# EAGLE board Robot_Psoc (EAGLE 7.6.0)
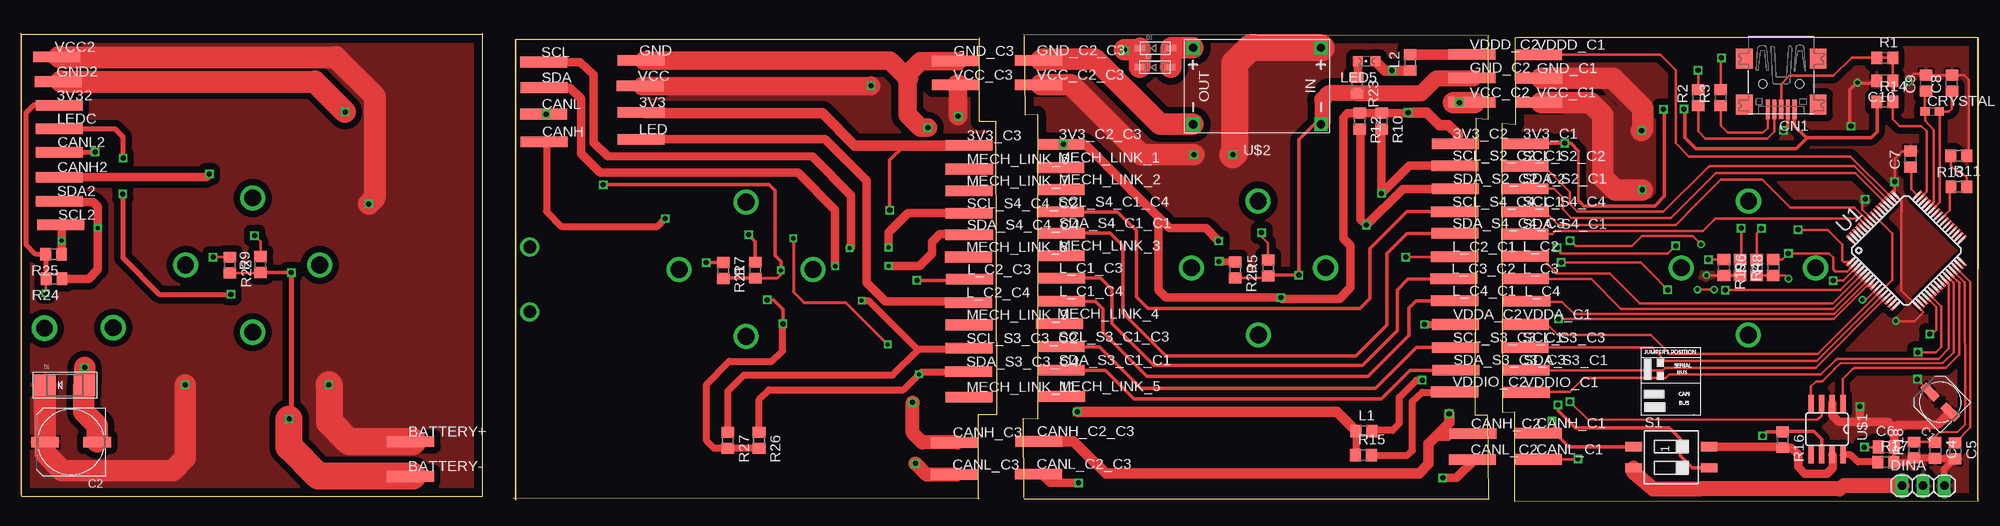
[diagram p0: board, top side]
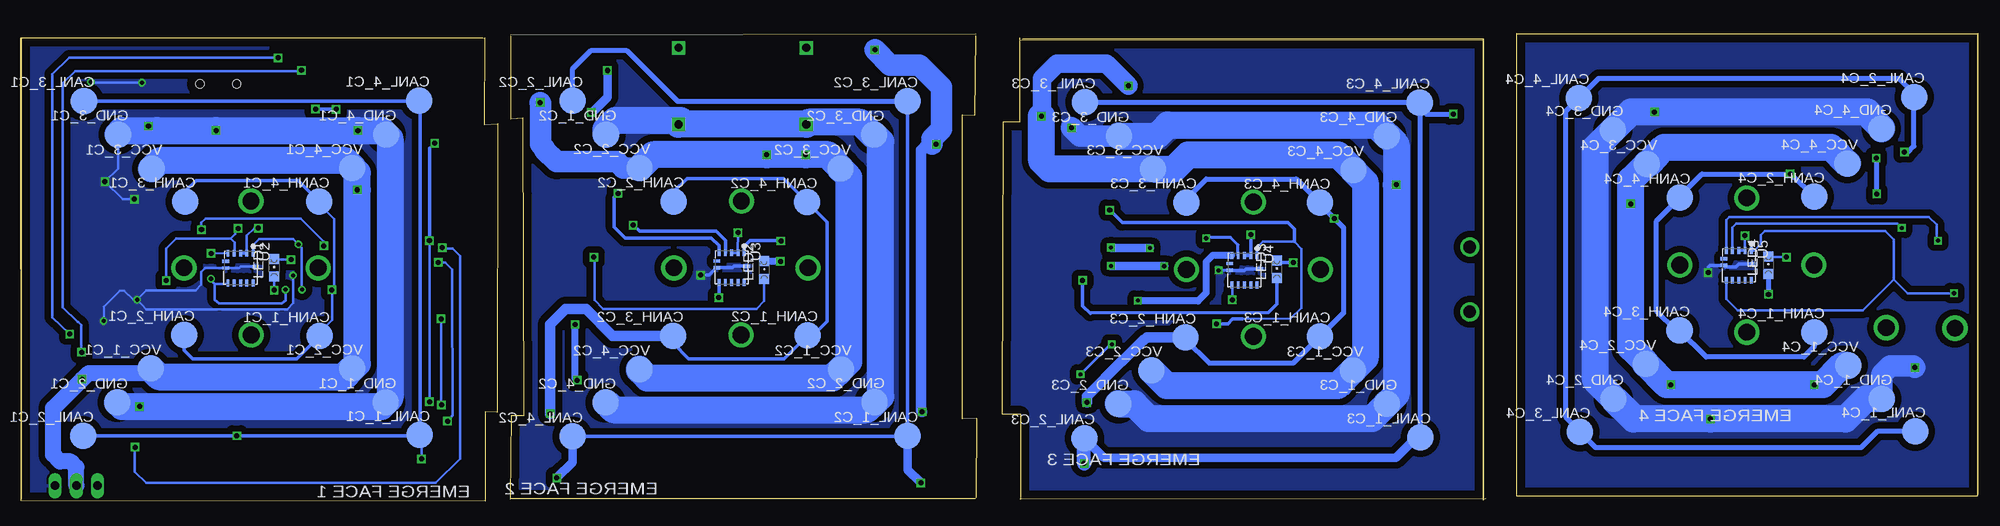
[diagram p1: board, bottom side, seen from below]

Size 233.42 x 55.85 mm. Coordinates in mm from the lower left corner, seen from the top.
Outline: 119.5,55.75 175,55.59
Outline: 114.3,55.35 114.26,45.31 116.23,45.31 116.33,10.37 114.16,10.35 114.14,0.25
Outline: 175.04,0.23 174.93,10.22 173.43,10.25 173.53,45.74 174.93,45.64 174.93,55.5
Outline: 119.59,55.55 119.69,46.11 121.17,46.16 121.17,9.83 119.43,9.91 119.53,0.44
Outline: 0.02,55.62 0.02,0.62 55.02,0.62 55.02,55.62
Outline: 114.3,0.31 58.72,0.36
Outline: 233.34,0.3 233.34,55.3
Outline: 119.56,0.31 175.1,0.32
Outline: 113.97,55.15 58.97,55.15 58.97,0.15
Outline: 0,0.76 0,55.76 55,55.76 55,0.76
Outline: 55,0.85 55,55.85
Outline: 0,0.85 0,55.85
Outline: 114.34,55 59,55.12 59,0.12
Outline: 178.37,55.33 233.37,55.33 233.37,0.33
Outline: 178.18,44.97 176.58,45.07 176.63,10.62 178.08,10.67 178.08,0 233.37,0.04 233.42,55.29 178.11,55.35 178.18,44.97
Copper layers (1*16): Top 0.035mm / dielectric 1.5mm / Bottom 0.035mm
Design rules "default": minimum track width 10mil, minimum drill 24mil, track to track 8mil, track to pad 8mil, pad to pad 8mil, via to via 8mil, smd to smd 8mil, copper to edge 40mil, drill to drill 8mil, minimum pad ring 10mil, minimum via ring 8mil, stop-mask expansion 4mil, vias tented up to drill 0mil, thermal gap 10mil

## Footprints (pad centres in the part's own frame; a part is rotated, then mirrored left to right if it is on the bottom)
TP11R = smd 0.635 x 1.27: P$1 0.381,0; P$2 1.016,0; P$3 -0.254,0; P$4 -0.889,0; P$5 -1.524,0; P$6 1.613,0; P$7 2.21,0; P$8 -2.146,0; P$9 -2.769,0 | smd 1.1 x 1.1: TP 0,0
UD-5X5,8_NICHICON = smd 2.3 x 1: + 1.725,0; - -1.7,0
UD-8X10_NICHICON = smd 3.3 x 1.3: + 3.125,0; - -3.125,0
C0805 = smd 1.3 x 1.5: 1 -0.95,0; 2 0.95,0
B2,54 = smd 3.175 x 3.175 bottom: P$1 0,0 | smd 2.54 x 2.54 bottom: TP 0,0
USB-MINIB = smd 0.5 x 2.308: D+ 0,4.064; D- -0.8,4.064; GND 1.6,4.064; ID 0.8,4.064; VBUS -1.6,4.064 | smd 2 x 2.4: GND1 -4.4,-2; GND2 -4.4,3.5; GND3 4.4,3.5; GND4 4.4,-2 | hole 1: -2.2,1; 2.2,1
C0603 = smd 1.1 x 1: 1 -0.85,0; 2 0.85,0
SMADIODE = smd 2.54 x 2.54: A 2.349,0; C -2.349,0
SOD-123 = smd 1.2 x 0.7: A 1.85,0; C -1.85,0
1X03 = drill 1.016 long: 1 -2.54,0; 2 0,0; 3 2.54,0
R0805 = smd 1.3 x 1.5: 1 -0.95,0; 2 0.95,0
CHIPLED_0805 = smd 1.2 x 1.2: A 0,-1.05; C 0,1.05
SMS-002 = smd 1.092 x 2.007: 1 -1.27,-4.496; 2 1.27,-4.496; 3 1.27,4.496; 4 -1.27,4.496
TQFP64-10X10 = smd 1.2 x 0.3: 1 -5.7,3.75; 2 -5.7,3.25; 3 -5.7,2.75; 4 -5.7,2.25; 5 -5.7,1.75; 6 -5.7,1.25; 7 -5.7,0.75; 8 -5.7,0.25; 9 -5.7,-0.25; 10 -5.7,-0.75; 11 -5.7,-1.25; 12 -5.7,-1.75; 13 -5.7,-2.25; 14 -5.7,-2.75; 15 -5.7,-3.25; 16 -5.7,-3.75; 33 5.7,-3.75; 34 5.7,-3.25; 35 5.7,-2.75; 36 5.7,-2.25; 37 5.7,-1.75; 38 5.7,-1.25; 39 5.7,-0.75; 40 5.7,-0.25; 41 5.7,0.25; 42 5.7,0.75; 43 5.7,1.25; 44 5.7,1.75; 45 5.7,2.25; 46 5.7,2.75; 47 5.7,3.25; 48 5.7,3.75 | smd 0.3 x 1.2: 17 -3.75,-5.7; 18 -3.25,-5.7; 19 -2.75,-5.7; 20 -2.25,-5.7; 21 -1.75,-5.7; 22 -1.25,-5.7; 23 -0.75,-5.7; 24 -0.25,-5.7; 25 0.25,-5.7; 26 0.75,-5.7; 27 1.25,-5.7; 28 1.75,-5.7; 29 2.25,-5.7; 30 2.75,-5.7; 31 3.25,-5.7; 32 3.75,-5.7; 49 3.75,5.7; 50 3.25,5.7; 51 2.75,5.7; 52 2.25,5.7; 53 1.75,5.7; 54 1.25,5.7; 55 0.75,5.7; 56 0.25,5.7; 57 -0.25,5.7; 58 -0.75,5.7; 59 -1.25,5.7; 60 -1.75,5.7; 61 -2.25,5.7; 62 -2.75,5.7; 63 -3.25,5.7; 64 -3.75,5.7
XDCR_VCNL4010-GS08 = smd 0.805 x 0.35: 1 -1.772,1.5; 2 -1.772,0.75; 3 -1.772,0; 4 -1.772,-0.75; 5 -1.772,-1.5; 7 1.772,-1.5; 8 1.772,-0.75; 9 1.772,0; 10 1.772,0.75; 11 1.772,1.5 | smd 0.4 x 0.805: 6 -0.8,-1.772; 12 -0.175,1.772; 13 0,-1.772
SO8 = smd 0.66 x 2.032: 1 -1.905,-3.073; 2 -0.635,-3.073; 3 0.635,-3.073; 4 1.905,-3.073; 5 1.905,3.073; 6 0.635,3.073; 7 -0.635,3.073; 8 -1.905,3.073
DC-DC-STEP-DOWN-MP2307 = drill 1 pad 1.6 square: IN+ -7.62,-4.572; IN- -7.62,4.572; OUT+ 7.62,-4.572; OUT- 7.62,4.572

## Placement (x,y rotation side)
3V3  PTR1TP11R  [TP11R]  74.2,46.43 0 top
3V3_C1  PTR1TP11R  [TP11R]  179.65,42.67 0 top
3V3_C2  PTR1TP11R  [TP11R]  171.3,42.67 0 top
3V3_C2_C3  PTR1TP11R  [TP11R]  124.28,42.61 0 top
3V3_C3  PTR1TP11R  [TP11R]  113.3,42.46 0 top
3V32  PTR1TP11R  [TP11R]  4.77,47.24 0 top
BATTERY+  PTR1TP11R  [TP11R]  46.7,7.11 0 top
BATTERY-  PTR1TP11R  [TP11R]  46.68,2.98 0 top
C1  [UD-5X5,8_NICHICON]  228.85,11.83 135 top
C2  [UD-8X10_NICHICON]  5.92,7.06 180 top
C4  2200pF  [C0805]  228.24,6.09 270 top
C5  10nF  [C0805]  230.63,6.04 270 top
C6  1u  [C0805]  222.4,6.5 0 top
C7  1u  [C0805]  225.32,40.84 90 top
C8  36pF  [C0805]  230.25,49.9 90 top
C9  18pF  [C0805]  227.18,49.9 90 top
C10  0.1u  [C0805]  222.22,50.18 180 top
CANH  PTR1TP11R  [TP11R]  62.61,42.9 0 top
CANH2  PTR1TP11R  [TP11R]  4.79,38.68 0 top
CANH_1_C1  TPB2,54  [B2,54]  197.82,19.71 0 top
CANH_1_C2  TPB2,54  [B2,54]  139.61,19.82 0 top
CANH_1_C3  TPB2,54  [B2,54]  78.49,19.67 0 top
CANH_1_C4  TPB2,54  [B2,54]  19.54,20.17 0 top
CANH_2_C1  TPB2,54  [B2,54]  213.93,19.86 0 top
CANH_2_C2  TPB2,54  [B2,54]  155.56,35.79 0 top
CANH_2_C3  TPB2,54  [B2,54]  94.51,19.54 0 top
CANH_2_C4  TPB2,54  [B2,54]  19.53,36.35 0 top
CANH_3_C1  TPB2,54  [B2,54]  213.82,35.77 0 top
CANH_3_C2  TPB2,54  [B2,54]  155.64,19.75 0 top
CANH_3_C3  TPB2,54  [B2,54]  94.43,35.68 0 top
CANH_3_C4  TPB2,54  [B2,54]  35.6,20.38 0 top
CANH_4_C1  TPB2,54  [B2,54]  197.86,35.76 0 top
CANH_4_C2  TPB2,54  [B2,54]  139.68,35.71 0 top
CANH_4_C3  TPB2,54  [B2,54]  78.49,35.63 0 top
CANH_4_C4  TPB2,54  [B2,54]  35.55,36.23 0 top
CANH_C1  PTR1TP11R  [TP11R]  181.2,8.12 0 top
CANH_C2  PTR1TP11R  [TP11R]  173.4,8.07 0 top
CANH_C2_C3  PTR1TP11R  [TP11R]  121.64,7.16 0 top
CANH_C3  PTR1TP11R  [TP11R]  111.59,7.02 0 top
CANL  PTR1TP11R  [TP11R]  62.58,46.21 0 top
CANL2  PTR1TP11R  [TP11R]  4.8,41.66 0 top
CANL_1_C1  TPB2,54  [B2,54]  185.87,7.9 0 top
CANL_1_C2  TPB2,54  [B2,54]  127.66,7.8 0 top
CANL_1_C3  TPB2,54  [B2,54]  66.5,7.62 0 top
CANL_1_C4  TPB2,54  [B2,54]  7.48,8.34 0 top
CANL_2_C1  TPB2,54  [B2,54]  225.99,7.81 0 top
CANL_2_C2  TPB2,54  [B2,54]  167.63,47.79 0 top
CANL_2_C3  TPB2,54  [B2,54]  106.56,7.52 0 top
CANL_2_C4  TPB2,54  [B2,54]  7.6,48.25 0 top
CANL_3_C1  TPB2,54  [B2,54]  225.91,47.78 0 top
CANL_3_C2  TPB2,54  [B2,54]  127.69,47.75 0 top
CANL_3_C3  TPB2,54  [B2,54]  106.5,47.62 0 top
CANL_3_C4  TPB2,54  [B2,54]  47.48,8.28 0 top
CANL_4_C1  TPB2,54  [B2,54]  185.92,47.83 0 top
CANL_4_C2  TPB2,54  [B2,54]  167.65,7.73 0 top
CANL_4_C3  TPB2,54  [B2,54]  66.6,47.59 0 top
CANL_4_C4  TPB2,54  [B2,54]  47.6,48.13 0 top
CANL_C1  PTR1TP11R  [TP11R]  181.2,5 0 top
CANL_C2  PTR1TP11R  [TP11R]  173.35,4.97 0 top
CANL_C2_C3  PTR1TP11R  [TP11R]  121.59,3.24 0 top
CANL_C3  PTR1TP11R  [TP11R]  111.55,3.17 0 top
CN1  [USB-MINIB]  209.88,50.82 180 top
CRYSTAL  32.768kHz  [C0603]  227.89,46.53 0 top
D1  [SMADIODE]  5.17,13.87 0 top
D2  [SOD-123]  135.2,51.79 0 top
D3  [SOD-123]  135.23,54.07 0 top
DINA  [1X03]  226.82,1.85 0 top
GND  PTR1TP11R  [TP11R]  74.2,52.6 0 top
GND2  PTR1TP11R  [TP11R]  4.69,50.08 0 top
GND_1_C1  TPB2,54  [B2,54]  189.9,11.82 0 top
GND_1_C2  TPB2,54  [B2,54]  163.64,43.78 0 top
GND_1_C3  TPB2,54  [B2,54]  70.52,11.63 0 top
GND_1_C4  TPB2,54  [B2,54]  11.48,12.23 0 top
GND_2_C1  TPB2,54  [B2,54]  221.92,11.79 0 top
GND_2_C2  TPB2,54  [B2,54]  131.64,11.83 0 top
GND_2_C3  TPB2,54  [B2,54]  102.54,11.63 0 top
GND_2_C4  TPB2,54  [B2,54]  43.49,12.23 0 top
GND_3_C1  TPB2,54  [B2,54]  221.85,43.79 0 top
GND_3_C2  TPB2,54  [B2,54]  131.68,43.75 0 top
GND_3_C3  TPB2,54  [B2,54]  102.47,43.59 0 top
GND_3_C4  TPB2,54  [B2,54]  43.54,44.32 0 top
GND_4_C1  TPB2,54  [B2,54]  189.89,43.78 0 top
GND_4_C2  TPB2,54  [B2,54]  163.69,11.79 0 top
GND_4_C3  TPB2,54  [B2,54]  70.52,43.6 0 top
GND_4_C4  TPB2,54  [B2,54]  11.52,44.45 0 top
GND_C1  PTR1TP11R  [TP11R]  181.25,50.49 0 top
GND_C2  PTR1TP11R  [TP11R]  173.25,50.54 0 top
GND_C2_C3  PTR1TP11R  [TP11R]  121.61,52.62 0 top
GND_C3  PTR1TP11R  [TP11R]  111.69,52.54 0 top
L1  330-600Ohm@1Mhz  [R0805]  160.12,8.38 0 top
L2  330-600Ohm@1Mhz  [R0805]  165.63,52.37 90 top
L_C1_C3  PTR1TP11R  [TP11R]  124.31,26.64 0 top
L_C1_C4  PTR1TP11R  [TP11R]  124.33,23.87 0 top
L_C2  PTR1TP11R  [TP11R]  179.62,29.23 0 top
L_C2_C1  PTR1TP11R  [TP11R]  171.22,29.18 0 top
L_C2_C3  PTR1TP11R  [TP11R]  113.38,26.48 0 top
L_C2_C4  PTR1TP11R  [TP11R]  113.25,23.71 0 top
L_C3  PTR1TP11R  [TP11R]  179.65,26.56 0 top
L_C3_C2  PTR1TP11R  [TP11R]  171.12,26.56 0 top
L_C4  PTR1TP11R  [TP11R]  179.83,23.87 0 top
L_C4_C1  PTR1TP11R  [TP11R]  171.22,23.92 0 top
LED  PTR1TP11R  [TP11R]  74.2,43.2 0 top
LED1  [CHIPLED_0805]  203.22,27.86 0 bottom
LED2  [CHIPLED_0805]  144.78,27.6 0 bottom
LED3  [CHIPLED_0805]  83.63,27.67 0 bottom
LED4  [CHIPLED_0805]  25.01,28.18 0 bottom
LED5  [CHIPLED_0805]  160.45,52.52 90 top
LEDC  PTR1TP11R  [TP11R]  4.81,44.46 0 top
MECH_LINK_1  PTR1TP11R  [TP11R]  124.2,39.82 0 top
MECH_LINK_2  PTR1TP11R  [TP11R]  124.28,37.2 0 top
MECH_LINK_3  PTR1TP11R  [TP11R]  124.25,29.31 0 top
MECH_LINK_4  PTR1TP11R  [TP11R]  124.1,21.18 0 top
MECH_LINK_5  PTR1TP11R  [TP11R]  124.31,12.52 0 top
MECH_LINK_6  PTR1TP11R  [TP11R]  113.33,39.64 0 top
MECH_LINK_7  PTR1TP11R  [TP11R]  113.3,37.05 0 top
MECH_LINK_8  PTR1TP11R  [TP11R]  113.25,29.15 0 top
MECH_LINK_9  PTR1TP11R  [TP11R]  113.27,21.05 0 top
MECH_LINK_11  PTR1TP11R  [TP11R]  113.27,12.43 0 top
R1  0  [R0805]  222.22,52.9 0 top
R2  0  [R0805]  200,48.15 90 top
R3  0  [R0805]  202.66,48.18 90 top
R4  220  [R0805]  204.98,27.91 270 top
R5  220  [R0805]  148.69,27.83 90 top
R6  4.7k  [R0805]  206.96,27.91 90 top
R7  220  [R0805]  87.52,27.57 90 top
R8  4.7k  [R0805]  208.94,27.91 90 top
R9  220  [R0805]  28.51,28.25 90 top
R10  4.7k  [R0805]  162.22,45.38 270 top
R11  0  [R0805]  231.09,37.53 0 top
R12  4.7k  [R0805]  159.59,45.35 270 top
R13  0  [R0805]  231.06,41.22 180 top
R14  4.7k  [R0805]  222.25,47.64 0 top
R15  0  [R0805]  160.07,5.49 0 top
R16  120  [R0805]  210.06,7.35 270 top
R17  10k  [R0805]  222.38,4.69 0 top
R18  0  [R0805]  225.73,6.11 90 top
R19  220  [R0805]  203.05,27.91 270 top
R20  220  [R0805]  144.78,27.6 270 top
R21  220  [R0805]  83.71,27.55 270 top
R22  220  [R0805]  24.88,28.18 270 top
R23  220  [R0805]  159.31,49.64 270 top
R24  4.7k  [R0805]  3.88,26.55 180 top
R25  4.7k  [R0805]  3.83,29.47 180 top
R26  4.7k  [R0805]  87.98,7.28 270 top
R27  4.7k  [R0805]  84.26,7.28 270 top
S1  SWS002  [SMS-002]  196.78,5.25 270 top
SCL  PTR1TP11R  [TP11R]  62.55,52.4 0 top
SCL2  PTR1TP11R  [TP11R]  4.94,33 0 top
SCL_S2_C2  PTR1TP11R  [TP11R]  179.58,40 0 top
SCL_S2_C2_C1  PTR1TP11R  [TP11R]  171.24,40.05 0 top
SCL_S3_C1_C3  PTR1TP11R  [TP11R]  124.25,18.43 0 top
SCL_S3_C3  PTR1TP11R  [TP11R]  179.6,18.33 0 top
SCL_S3_C3_C1  PTR1TP11R  [TP11R]  171.3,18.33 0 top
SCL_S3_C3_C2  PTR1TP11R  [TP11R]  113.27,18.25 0 top
SCL_S4_C1_C4  PTR1TP11R  [TP11R]  124.2,34.54 0 top
SCL_S4_C4  PTR1TP11R  [TP11R]  179.63,34.56 0 top
SCL_S4_C4_C1  PTR1TP11R  [TP11R]  171.22,34.54 0 top
SCL_S4_C4_C2  PTR1TP11R  [TP11R]  113.3,34.35 0 top
SDA  PTR1TP11R  [TP11R]  62.6,49.36 0 top
SDA2  PTR1TP11R  [TP11R]  4.79,35.82 0 top
SDA_S2_C1  PTR1TP11R  [TP11R]  179.58,37.31 0 top
SDA_S2_C2_C2  PTR1TP11R  [TP11R]  171.3,37.28 0 top
SDA_S3_C1  PTR1TP11R  [TP11R]  179.72,15.64 0 top
SDA_S3_C1_C1  PTR1TP11R  [TP11R]  124.28,15.64 0 top
SDA_S3_C3_C3  PTR1TP11R  [TP11R]  171.35,15.67 0 top
SDA_S3_C3_C4  PTR1TP11R  [TP11R]  113.25,15.46 0 top
SDA_S4_C1  PTR1TP11R  [TP11R]  179.61,31.9 0 top
SDA_S4_C1_C1  PTR1TP11R  [TP11R]  124.31,32 0 top
SDA_S4_C4_C3  PTR1TP11R  [TP11R]  171.24,31.97 0 top
SDA_S4_C4_C4  PTR1TP11R  [TP11R]  113.33,31.79 0 top
U1  CY8C4247AZI-M485  [TQFP64-10X10]  224.81,29.91 45 top
U2  VCNL4010-GS08  [XDCR_VCNL4010-GS08]  207.24,27.83 270 bottom
U3  VCNL4010-GS08  [XDCR_VCNL4010-GS08]  148.66,27.88 270 bottom
U4  VCNL4010-GS08  [XDCR_VCNL4010-GS08]  87.49,27.57 270 bottom
U5  VCNL4010-GS08  [XDCR_VCNL4010-GS08]  28.54,28.15 270 bottom
U$1  SN65HVD230/1  [SO8]  215.34,8.6 180 top
U$2  DC-DC-STEP-DOWN-MP2307  [DC-DC-STEP-DOWN-MP2307]  147.37,49.55 180 top
VCC  PTR1TP11R  [TP11R]  74.05,49.57 0 top
VCC2  PTR1TP11R  [TP11R]  4.5,53.03 0 top
VCC_1_C1  TPB2,54  [B2,54]  217.94,15.84 0 top
VCC_1_C2  TPB2,54  [B2,54]  135.61,15.76 0 top
VCC_1_C3  TPB2,54  [B2,54]  74.56,15.61 0 top
VCC_1_C4  TPB2,54  [B2,54]  15.5,16.19 0 top
VCC_2_C1  TPB2,54  [B2,54]  193.89,15.84 0 top
VCC_2_C2  TPB2,54  [B2,54]  159.62,39.79 0 top
VCC_2_C3  TPB2,54  [B2,54]  98.56,15.61 0 top
VCC_2_C4  TPB2,54  [B2,54]  39.64,16.38 0 top
VCC_3_C1  TPB2,54  [B2,54]  217.83,39.7 0 top
VCC_3_C2  TPB2,54  [B2,54]  135.69,39.7 0 top
VCC_3_C3  TPB2,54  [B2,54]  98.43,39.66 0 top
VCC_3_C4  TPB2,54  [B2,54]  39.53,40.25 0 top
VCC_4_C1  TPB2,54  [B2,54]  193.91,39.76 0 top
VCC_4_C2  TPB2,54  [B2,54]  159.65,15.74 0 top
VCC_4_C3  TPB2,54  [B2,54]  74.5,39.54 0 top
VCC_4_C4  TPB2,54  [B2,54]  15.58,40.3 0 top
VCC_C1  PTR1TP11R  [TP11R]  181.25,47.59 0 top
VCC_C2  PTR1TP11R  [TP11R]  173.28,47.59 0 top
VCC_C2_C3  PTR1TP11R  [TP11R]  121.61,49.7 0 top
VCC_C3  PTR1TP11R  [TP11R]  111.66,49.69 0 top
VDDA_C1  PTR1TP11R  [TP11R]  179.64,21.1 0 top
VDDA_C2  PTR1TP11R  [TP11R]  171.3,21.1 0 top
VDDD_C1  PTR1TP11R  [TP11R]  181.2,53.28 0 top
VDDD_C2  PTR1TP11R  [TP11R]  173.28,53.31 0 top
VDDIO_C1  PTR1TP11R  [TP11R]  179.75,13 0 top
VDDIO_C2  PTR1TP11R  [TP11R]  171.22,13.05 0 top

## Library data of the parts
3V3 3V3_C1 3V3_C2 3V3_C2_C3 3V3_C3 3V32 BATTERY+ BATTERY- CANH CANH2 CANH_1_C1-CANH_1_C4 CANH_2_C1-CANH_2_C4 CANH_3_C1-CANH_3_C4 CANH_4_C1-CANH_4_C4 CANH_C1 CANH_C2 CANH_C2_C3 CANH_C3 CANL CANL2 CANL_1_C1-CANL_1_C4 CANL_2_C1-CANL_2_C4 CANL_3_C1-CANL_3_C4 CANL_4_C1-CANL_4_C4 CANL_C1 CANL_C2 CANL_C2_C3 CANL_C3 GND GND2 GND_1_C1-GND_1_C4 GND_2_C1-GND_2_C4 GND_3_C1-GND_3_C4 GND_4_C1-GND_4_C4 GND_C1 GND_C2 GND_C2_C3 GND_C3 L_C1_C3 L_C1_C4 L_C2 L_C2_C1 L_C2_C3 L_C2_C4 L_C3 L_C3_C2 L_C4 L_C4_C1 LED LEDC MECH_LINK_1-MECH_LINK_9 MECH_LINK_11 SCL SCL2 SCL_S2_C2 SCL_S2_C2_C1 SCL_S3_C1_C3 SCL_S3_C3 SCL_S3_C3_C1 SCL_S3_C3_C2 SCL_S4_C1_C4 SCL_S4_C4 SCL_S4_C4_C1 SCL_S4_C4_C2 SDA SDA2 SDA_S2_C1 SDA_S2_C2_C2 SDA_S3_C1 SDA_S3_C1_C1 SDA_S3_C3_C3 SDA_S3_C3_C4 SDA_S4_C1 SDA_S4_C1_C1 SDA_S4_C4_C3 SDA_S4_C4_C4 VCC VCC2 VCC_1_C1-VCC_1_C4 VCC_2_C1-VCC_2_C4 VCC_3_C1-VCC_3_C4 VCC_4_C1-VCC_4_C4 VCC_C1 VCC_C2 VCC_C2_C3 VCC_C3 VDDA_C1 VDDA_C2 VDDD_C1 VDDD_C2 VDDIO_C1 VDDIO_C2 = testpad
C1 C2 C4-C10 CRYSTAL L1 L2 R1-R27 = rcl
CN1 D1-D3 LED1-LED5 = adafruit
DINA = pinhead
S1 = smd-special
U1 = CypressPSoC
U2-U5 = VCNL4010-GS08
U$1 = texas_instruments
U$2 = diy-modules

## Nets
3V3_C1: 3V3_C1.TP CN1.VBUS R6.1 R8.1 R14.1 U2.1 U2.7 U$1.3
3V3_C2: 3V3_C2.TP 3V3_C2_C3.TP D2.C D3.C L1.1 L2.1 LED5.A R10.1 R12.1 R15.1 U3.1 U3.7
3V3_C3: 3V3.TP 3V3_C3.TP R26.2 R27.2 U4.1 U4.7
3V3_C4: 3V32.TP R24.2 R25.2 U5.1 U5.7
CAN_RX: U1.27 U$1.4
CAN_TX: U1.28 U$1.1
CANH: CANH_1_C1.TP CANH_2_C1.TP CANH_3_C1.TP CANH_4_C1.TP CANH_C1.TP S1.1
CANH_C3: CANH.TP CANH_1_C3.TP CANH_2_C3.TP CANH_3_C3.TP CANH_4_C3.TP CANH_C3.TP
CANH_C4: CANH2.TP CANH_1_C4.TP CANH_2_C4.TP CANH_3_C4.TP CANH_4_C4.TP
CANL: CANL_1_C1.TP CANL_2_C1.TP CANL_3_C1.TP CANL_4_C1.TP CANL_C1.TP R16.1 U$1.6
CANL_C3: CANL.TP CANL_1_C3.TP CANL_2_C3.TP CANL_3_C3.TP CANL_4_C3.TP CANL_C3.TP
CANL_C4: CANL2.TP CANL_1_C4.TP CANL_2_C4.TP CANL_3_C4.TP CANL_4_C4.TP
CMOD: C4.1 R18.2 U1.29
CTANK: C5.1 U1.30
DN_1: DINA.1 S1.2
GND3: GND.TP GND_1_C3.TP GND_2_C3.TP GND_3_C3.TP GND_4_C3.TP GND_C3.TP R7.1 R21.2 U4.12 U4.13
GND4: BATTERY-.TP C2.- D1.A GND2.TP GND_1_C4.TP GND_2_C4.TP GND_3_C4.TP GND_4_C4.TP R9.1 R22.2 U5.12 U5.13
GND_C1: C1.- C4.2 C5.2 C6.2 C7.2 C8.2 C9.2 C10.2 CN1.D- DINA.3 GND_1_C1.TP GND_2_C1.TP GND_3_C1.TP GND_4_C1.TP GND_C1.TP R4.2 R13.1 R17.2 R18.1 R19.2 U1.10 U1.17 U1.49 U1.57 U2.12 U2.13 U$1.2
GND_C2: GND_1_C2.TP GND_2_C2.TP GND_3_C2.TP GND_4_C2.TP GND_C2.TP GND_C2_C3.TP R5.1 R20.2 R23.2 U3.12 U3.13 U$2.IN- U$2.OUT-
LED_S1: LED1.A U1.4
LED_S2: L_C2.TP U1.5
LED_S2_C2: L_C2_C1.TP LED2.A
LED_S3: L_C3.TP U1.6
LED_S3_C3: L_C2_C3.TP LED3.A
LED_S4: L_C4.TP U1.7
LED_S4_C4: LED4.A LEDC.TP
LED_T_S4: L_C2_C4.TP LED.TP
MOTOR: S1.3 U1.8 U1.9
N$1: CN1.D+ R1.1
N$2: CN1.ID R2.1
N$3: CN1.GND R3.1
N$4: R11.2 R13.2
N$5: R16.2 S1.4 U$1.7
N$7: CANH_1_C2.TP CANH_2_C2.TP CANH_3_C2.TP CANH_4_C2.TP CANH_C2.TP CANH_C2_C3.TP
N$8: R7.2 U4.2 U4.3
N$9: R17.1 U$1.8
N$10: SDA_S3_C1_C1.TP SDA_S3_C3_C3.TP
N$14: LED1.C R19.1
N$15: LED2.C R20.1
N$16: LED3.C R21.1
N$17: LED4.C R22.1
N$18: LED5.C R23.1
N$20: L_C1_C4.TP L_C4_C1.TP
N$21: R4.1 U2.2 U2.3
N$22: L_C1_C3.TP L_C3_C2.TP
N$24: D2.A D3.A U$2.OUT+
N$26: SCL_S3_C1_C3.TP SCL_S3_C3_C1.TP
N$27: SCL_S4_C1_C4.TP SCL_S4_C4_C1.TP
N$32: CANL_1_C2.TP CANL_2_C2.TP CANL_3_C2.TP CANL_4_C2.TP CANL_C2.TP CANL_C2_C3.TP
N$43: R5.2 U3.2 U3.3
N$44: SDA_S4_C1_C1.TP SDA_S4_C4_C3.TP
N$46: R9.2 U5.2 U5.3
P0_1: R11.1 U1.40
P0_4: C8.1 CRYSTAL.2 U1.43
P0_5: C9.1 CRYSTAL.1 U1.44
SAR_BY: C6.1 U1.1
SCL_S1: R8.2 U1.2 U2.5
SCL_S2: SCL_S2_C2.TP U1.51
SCL_S2_U: R10.2 SCL_S2_C2_C1.TP U3.5
SCL_S3: SCL_S3_C3.TP U1.12
SCL_S3_U: R27.1 SCL_S3_C3_C2.TP U4.5
SCL_S4: SCL_S4_C4.TP U1.58
SCL_S4_U: SCL.TP SCL_S4_C4_C2.TP
SCL_S4_U_1: R25.1 SCL2.TP U5.5
SDA_S1: R6.2 U1.3 U2.4
SDA_S2: SDA_S2_C1.TP U1.52
SDA_S2_U: R12.2 SDA_S2_C2_C2.TP U3.4
SDA_S3: SDA_S3_C1.TP U1.13
SDA_S3_U: R26.1 SDA_S3_C3_C4.TP U4.4
SDA_S4: SDA_S4_C1.TP U1.59
SDA_S4_U: SDA.TP SDA_S4_C4_C4.TP
SDA_S4_U_1: R24.1 SDA2.TP U5.4
SWDCLK: R2.2 U1.21
SWDIO: R3.2 U1.20
UART_RX: U1.37
UART_TX: U1.38
VCC_C2: U$2.IN+ VCC_1_C2.TP VCC_2_C2.TP VCC_3_C2.TP VCC_4_C2.TP VCC_C2.TP VCC_C2_C3.TP
VCC_C3: VCC.TP VCC_1_C3.TP VCC_2_C3.TP VCC_3_C3.TP VCC_4_C3.TP VCC_C3.TP
VCC_C4: BATTERY+.TP C2.+ D1.C VCC2.TP VCC_1_C4.TP VCC_2_C4.TP VCC_3_C4.TP VCC_4_C4.TP
VCCC: C1.+ DINA.2 VCC_1_C1.TP VCC_2_C1.TP VCC_3_C1.TP VCC_4_C1.TP VCC_C1.TP
VCCD: C7.1 U1.48
VDDA: U1.11 U1.56 VDDA_C1.TP
VDDA2: L1.2 VDDA_C2.TP
VDDD: U1.50 VDDD_C1.TP
VDDD2: L2.2 VDDD_C2.TP
VDDIO: U1.26 VDDIO_C1.TP
VDDIO2: R15.2 VDDIO_C2.TP
XRES: C10.1 R1.2 R14.2 U1.47

## Tracks (layer width: path | path; a pad name or v marks a point on that pad's centre or on a via)
3V3_C1  (via drill 0.5, 0.6)
  Top 0.27: R8.1 210.36,26.96 v210.76,26.56 | v199.9,25.27 v201.88,25.27
  Top 0.305: 221.31,47.63 R14.1 | R6.1 R8.1 | v184.08,42.74 182.35,42.74 182.33,42.72 | U$1.3 214.7,10.18 214.28,9.76 186.88,9.74 v184.7,11.89 | 212.86,43.4 212.86,43.29 | 198.4,46.71 v198.28,46.83 | 196.01,46.64 v195.85,46.79 195.97,46.67 | 185.72,41.81 185.72,35.88 | v184.71,31.1 184.68,31.16 184.71,31.16 185.41,30.46 192.09,30.46 193.26,31.63 199.37,31.63 v200.34,30.66
  Top 0.406: CN1.VBUS 211.48,44.79 212.86,43.4 220.61,43.4 221.33,44.13 221.33,47.61 R14.1 | 212.86,43.29 211.69,42.11 199.69,42.11 198.4,43.4 198.4,46.71 | v184.08,42.74 184.79,42.74 185.72,41.81 | 185.72,35.88 186.36,35.23 194.79,35.23 195.97,36.41 195.97,46.67
  Top 0.5: v184.08,42.74 182.33,42.72 179.49,42.68 3V3_C1.TP
  Bottom 0.27: v210.76,26.56 210.76,26.38 210.29,25.92 | 210.29,25.92 210.29,25.91 208.88,25.91 U2.7 | U2.1 205.74,30.58 205.04,31.28 200.96,31.28 | 200.96,31.28 199.93,30.25 199.93,25.56 v199.9,25.27 | v201.88,25.27 201.88,23.99 202.3,23.58 209.75,23.58 210.29,23.99 210.29,25.92 | 200.96,31.28 v200.34,30.66
  Bottom 0.305: 184.68,42.14 v184.08,42.74 | v184.7,11.89 184.7,30.56 v184.71,31.1 | 195.89,46.83 v195.85,46.79
  Bottom 0.406: v184.71,31.1 184.68,42.14 | v198.28,46.83 195.89,46.83
3V3_C2  (via drill 0.6)
  Top 0.813: L1.1 159.17,5.4 R15.1
  Top 1.016: 135.58,33.9 135.58,25.24 136.52,24.3 v150.21,24.3 150.36,24.16 157.19,24.16 158.52,25.49 158.52,30.52 157.66,31.38 157.66,45.81 158.15,46.3 R12.1 162.19,46.3 R10.1 165.32,46.33 v165.39,46.41 | 135.58,33.9 133.17,36.32 | 135.58,33.9 136.9,32.58 141.25,32.58 v142.77,31.06 | 125.83,42.61 126.87,42.61 133.17,36.32 | 133.17,36.32 133.14,36.32 132.5,36.95 132.45,36.95 132.41,37
  Top 1.27: 3V3_C2.TP 171.3,43.82 170.22,44.89 169.11,44.89 167.64,46.37 165.46,46.37 v165.39,46.41 | L2.1 v163.48,51.42 162.6,51.42 LED5.A | L1.1 156.88,10.67 v125.93,10.67 | 3V3_C2_C3.TP 125.83,42.61
  Top 2.54: D3.C 133.38,51.82 D2.C 133.37,51.82 133.37,53.93 133.32,53.88 v131.57,53.88
  Bottom 0.406: U3.7 150.16,24.35 v150.21,24.3 | U3.1 147.16,30.42 146.48,31.11 142.82,31.11 v142.77,31.06
  Bottom 1.016: v165.39,46.41 165.26,46.45 163.48,48.23 v163.48,51.42
  Bottom 1.27: v125.93,10.67 126.1,10.83 126.1,41.94 125.42,42.61 124.79,42.61 3V3_C2_C3.TP
  Bottom 2.54: v131.57,53.88 129.76,52.07 126.26,52.07 123.64,49.45 123.64,44.4 124.79,43.26 124.79,42.61
  other vias: 124.28,42.61
3V3_C3  (via drill 0.6)
  Top 0.406: v103.56,34.74 103.56,40.72 105.3,42.46 | v88.94,24.05 89.67,24.05 90.84,22.89 90.84,21.21 v90.81,21.19
  Top 0.813: R26.2 R27.2 | R26.2 82.59,6.33 81.72,7.21 81.72,13.97 84.42,16.71 89.49,16.71 90.78,17.95 90.78,20.75 v90.81,21.19 | 87.75,6.11 R26.2
  Top 1.27: 3V3_C3.TP 105.3,42.46 99.38,42.46 95.54,46.29 74.34,46.29 3V3.TP
  Bottom 0.305: U4.1 85.99,30.34 85.31,31.03 81.55,31.03 80.68,30.12 80.71,23.09 82,21.8 87.74,21.76 | v88.94,24.05 88.94,25.75 U4.7
  Bottom 0.406: 81.55,31.03 81.55,32.49 82.3,33.24 102.07,33.24 v103.56,34.74 | v90.81,21.19 89.47,21.19 88.91,21.75 87.75,21.75 87.74,21.76
3V3_C4  (via drill 0.5)
  Top 0.305: v2.87,24.84 2.87,26.48 R24.2
  Top 0.61: 2.88,26.6 R25.2 1.73,29.48 0.55,30.65 0.55,46.36 1.5,47.31 4.7,47.31
  Top 1.016: 2.88,26.6 R24.2 | 4.7,47.31 3V32.TP
  Bottom 0.305: U5.1 26.66,29.92 25.91,30.68 25.91,31.76 25.44,32.23 11.06,32.23 10.04,31.22 10.04,26.48 | 10.04,26.48 8.36,24.8 2.91,24.8 v2.87,24.84 | U5.7 30.04,24.14 28.66,22.76 13.76,22.76 10.04,26.48
CAN_RX
  Top 0.27: 216.31,15.82 216.22,15.79 216.91,16.48 229.18,16.51 230.46,17.79 230.46,26.04 230.4,26.1
  Top 0.28: U$1.4 213.43,13.69 214.07,14.32 214.81,14.32 216.31,15.82
  Top 0.305: U1.27 229.73,26.73 229.78,26.73 230.4,26.1 | 213.51,11.75 U$1.4
CAN_TX
  Top 0.27: U$1.1 217.24,14.59 218.45,15.79 218.47,15.79 218.62,15.94 229.53,15.94 231.14,17.55 231.14,26.06 230.76,26.44
  Top 0.305: U1.28 230.76,26.44 231.16,26.03
CANH  (via drill 0.6)
  Top 0.305: S1.1 184.6,6.52 182.81,8.31 182.81,9.35 v182.55,9.56 | 193.57,28.07 194.29,27.36 | 194.29,27.36 v196.35,25.24 | v183.66,28.52 193.13,28.52 194.29,27.36
  Top 0.406: S1.1 184.55,6.52 182.94,8.13 181.21,8.13 CANH_C1.TP
  Bottom 0.305: v182.55,9.56 181.93,10.23 181.99,26.33 181.99,27.64 182.81,28.47 183.61,28.47 v183.66,28.52 | 197.73,19.71 197.73,20.24 196.31,21.66 196.31,25.2 v196.35,25.24 196.04,25.54 196.04,33.71 197.86,35.53 CANH_4_C1.TP
  Bottom 0.406: CANH_2_C1.TP 213.93,17.99 212.96,17.01 200.52,17.01 CANH_1_C1.TP 197.73,19.71 | CANH_3_C1.TP 213.82,37 212.55,38.27 200.37,38.27 CANH_4_C1.TP
CANH_C3  (via drill 0.6)
  Top 0.813: CANH.TP 62.61,34.58 64.38,32.81 75.85,32.81 v76.78,33.74
  Top 1.676: CANH_C3.TP 107.44,7.02 106.28,8.17 v106.28,11.78
  Bottom 0.406: v76.78,33.74 76.78,33.92 CANH_4_C3.TP
  Bottom 0.61: CANH_3_C3.TP 94.43,36.06 92.03,38.46 81.32,38.46 CANH_4_C3.TP 78.49,35.45 v76.78,33.74 75.69,32.66 75.69,22.47 CANH_1_C3.TP 81.66,16.5 91.69,16.5 94.51,19.31 CANH_2_C3.TP
  Bottom 1.27: v106.28,11.78 106.28,12.54 102.15,16.68 102.11,16.68 99.56,19.23 99.49,19.23 99.15,19.57 94.54,19.57 CANH_2_C3.TP
CANH_C4  (via drill 0.6)
  Top 1.016: CANH2.TP 22.03,38.68 v22.42,39.07
  Bottom 0.61: CANH_1_C4.TP 19.53,18.46 20.78,17.21 32.43,17.21 CANH_3_C4.TP 36.07,20.38 38.36,22.67 38.36,33.42 CANH_4_C4.TP 35.55,36.44 32.92,39.07 v22.42,39.07 22.26,39.07 CANH_2_C4.TP
CANL  (via drill 0.6)
  Top 0.305: CANL_C1.TP 185.59,5 v185.64,5.05
  Top 0.406: v207.68,7.81 208.17,8.3 R16.1 210.12,8.36 213.76,8.36 214.7,7.41 U$1.6
  Bottom 0.305: v185.64,5.05 185.64,6.97 186.13,7.45
  Bottom 0.406: CANL_2_C1.TP v207.68,7.81 186.48,7.81 | 186.48,7.81 185.81,8.48 | 185.81,8.48 185.81,7.95 CANL_1_C1.TP | 185.81,8.48 185.81,47.73 CANL_4_C1.TP 185.97,47.78 CANL_3_C1.TP | 185.69,7.02 186.13,7.45 186.48,7.81
CANL_C3  (via drill 0.6)
  Top 0.61: CANL.TP 63.94,46.21 64.03,46.29 62.66,46.29 CANL.TP
  Top 1.676: CANL_C3.TP 107.97,3.17 v106.63,4.52
  Bottom 0.61: CANL_3_C3.TP 66.63,47.62 CANL_4_C3.TP | CANL_4_C3.TP 66.6,7.72 CANL_1_C3.TP | 106.46,7.62 CANL_2_C3.TP | CANL_4_C3.TP 66.6,47.01 65.77,46.18 62.61,46.18 CANL.TP
  Bottom 1.016: CANL_1_C3.TP 67.01,7.62 69.44,5.2 104.24,5.2 CANL_2_C3.TP
  Bottom 1.676: v106.63,4.52 106.63,7.46 CANL_2_C3.TP
  other vias: 62.58,46.21
CANL_C4  (via drill 0.6)
  Top 0.61: CANL2.TP 8.74,41.66 v8.78,41.7
  Bottom 0.61: CANL_1_C4.TP 12.03,8.34 13.97,6.39 45.59,6.39 CANL_3_C4.TP 47.48,8.37 49.14,10.04 49.14,46.58 CANL_4_C4.TP 45.27,50.45 9.44,50.45 7.6,48.62 CANL_2_C4.TP 7.64,48.22 7.64,42.38 8.32,41.7 v8.78,41.7
CMOD
  Top 0.25: C4.1 228.24,7.73 228.79,8.28 230.94,8.28 231.85,9.18 231.85,11.52 231.83,11.53
  Top 0.305: U1.29 231.8,26.1 231.83,11.53 | 227.86,7.07 R18.2
  Top 0.813: 227.86,7.07 C4.1
CTANK
  Top 0.305: U1.30 232.46,26.16 232.46,8.79 C5.1
DN_1
  Top 1.778: DINA.1 217.38,1.85 216.83,1.48 200.17,1.48 199.99,1.48 194.58,1.48 192.29,3.41 S1.2
GND3  (via drill 0.5, 0.6)
  Top 0.35: v90.57,27.56 90.57,27.06 90.1,26.59 87.55,26.59 R7.1
  Top 0.406: R21.2 83.73,26.62 R7.1 | v90.57,27.56 90.57,28.64 89.88,29.33 89.88,37.09 89.16,37.82 69.43,37.82 v69.38,37.77
  Top 2.184: v108.11,44.58 107.24,44.58 105.68,46.14 105.68,50.49 103.57,52.6 GND.TP | 105.68,50.97 107.23,52.53 GND_C3.TP
  Top 2.54: 105.68,50.49 105.68,50.97
  Bottom 0.35: 87.52,27.52 90.54,27.52 v90.57,27.56
  Bottom 0.406: U4.12 87.29,27.75 87.52,27.52 89.22,27.52 U4.13
  Bottom 2.54: GND_3_C3.TP 107.12,43.59 v108.11,44.58
  Bottom 3.2: GND_3_C3.TP 97.96,43.59 96.63,44.92 71.84,44.92 | 71.84,44.92 GND_4_C3.TP | 71.84,44.92 71.75,44.92 69.38,42.55 v69.38,37.77 69.38,12.76 GND_1_C3.TP 72.25,9.89 98.92,9.89 100.65,11.63 GND_2_C3.TP
  pour Bottom (isolate 0.762): 58.82,0.16 114.31,0.1 113.97,10.34 115.95,10.38 116.05,45.2 114.49,45.31 114.14,55.21 58.69,55.41
GND4  (via drill 0.6)
  Top 0.305: R22.2 28.44,27.23 R9.1
  Top 0.406: R9.1 32.16,27.3 v32.18,27.29
  Top 0.61: v32.18,27.29 32.18,9.53 31.92,9.27
  Top 2.54: C2.- 9.04,9.04 7.43,10.65 7.43,13.78 D1.A v7.53,15.95
  Top 2.6: GND2.TP 34.99,50.08 v38.6,46.47
  Top 3.2: BATTERY-.TP 35.42,2.98 31.92,6.48 31.92,9.27 v31.92,9.81
  Bottom 0.406: U5.12 28.51,28.33 28.87,27.96 30.12,27.96 U5.13 32,28.14 32.18,27.97 v32.18,27.29
  Bottom 2.54: GND_1_C4.TP 11.48,15.12 10.46,16.14 7.71,16.14 v7.53,15.95
  Bottom 3.2: GND_1_C4.TP 13.37,12.23 15.79,9.81 v31.92,9.81 41.07,9.81 | 41.07,9.81 GND_2_C4.TP | 41.07,9.81 41.07,9.92 45.63,14.48 45.63,42.24 GND_3_C4.TP 41.39,46.47 v38.6,46.47 13.18,46.47 12.73,46.02 12.73,45.79 11.52,44.58 GND_4_C4.TP
  pour Bottom (isolate 0.762): -0.01,0.8 54.92,0.64 55.05,55.35 -0.02,55.41 -0.01,7.88
GND_C1  (via drill 0.5, 0.6)
  Top 0.25: U$1.2 | U1.10 220.04,24.09 219.59,24.09 v219.57,24.06 | v223.56,21.52 225.82,21.52 226.86,22.56 U1.17
  Top 0.27: R4.2 201.29,26.96 v200.96,26.95
  Top 0.28: U1.49 223.44,40.92 224.27,41.76 225.29,41.76 C7.2 | 224.23,34.59 224.23,35.85 223.31,36.77 223.31,37.15 223.42,37.27 v223.42,38.14 | 223.42,38.77 223.42,38.94 | C10.2 220.9,50.18 220.63,49.92 219.02,49.92 v218.98,49.96 | v225.07,50.06 225.07,50.43 225.7,51.06 226.97,51.06 C9.2
  Top 0.305: 225.73,5.09 R18.1 226.49,5.14 | R17.2 223.25,6.22 C6.2 | U1.17 226.16,23.23 224.23,25.17 224.23,34.59 224.25,34.61 224.25,35.78 U1.49 | U1.10 | 228.42,5.09 C4.2 | R19.2 R4.2 | C9.2 C8.2 231.74,50.85 232.28,50.31 232.28,41.49 R13.1 | 220.58,33.77 220.58,33.8 | 220.58,33.8 219.54,34.84 219.54,35.71 v219.9,36.06 | v223.42,38.14 223.42,38.77 | U1.57 220.61,33.78 220.58,33.8
  Top 0.406: CN1.D- 210.68,44.73 v210.14,44.24 | 220.63,49.92 218.84,49.92 218.07,49.14 218.07,44.92 v218.22,44.77
  Top 0.813: 228.42,5.09 C5.2 229.36,3.82 DINA.3 | C4.2 226.49,5.14 | R17.2 225.08,4.67 R18.1
  Top 1: C6.2 223.35,8.71 | 223.35,8.71 222.57,9.48 216.74,9.48 215.98,10.25 U$1.2 | 223.35,8.71 223.78,9.14 228.56,9.14 C1.-
  Top 1.016: 222.57,9.48 219.76,9.48 219.26,9.99 219.26,11.28 v219.29,11.31
  Top 2.54: GND_C1.TP 189.84,50.49 193.39,46.94 193.39,44.39 v193.23,44.24
  Bottom 0.25: v219.57,24.06 220.06,24.06 221.1,25.1 221.67,25.1 223.56,23.21 v223.56,21.52
  Bottom 0.27: U2.13 211.48,27.83 211.93,27.38 211.93,25.85 212.6,25.18 218.46,25.18 v219.57,24.06 218.51,22.92 201.69,22.92 200.96,23.64 v200.96,26.95
  Bottom 0.28: v218.98,49.96 224.97,49.96 v225.07,50.06
  Bottom 0.305: U2.13 207.39,27.83 207.21,28.01 U2.12 | v219.9,36.06 221.32,36.06 v223.42,38.14 221.85,39.72 GND_3_C1.TP
  Bottom 0.406: v218.22,44.77 216.59,44.77 216.21,45.15 216.32,45.15 217.23,44.24
  Bottom 3.2: GND_2_C1.TP 221.87,11.79 221.39,11.31 v219.29,11.31 190.41,11.31 GND_1_C1.TP 189.41,12.31 189.41,43.3 189.89,43.77 | GND_4_C1.TP 189.89,43.77 | GND_3_C1.TP 221.85,43.81 221.41,44.24 217.23,44.24 v210.14,44.24 v193.23,44.24 190.36,44.24 189.89,43.77
  pour Top (isolate 0.762): 178.08,55.14 178.18,45.03 176.63,45.13 176.81,10.59 178.16,10.66 177.98,-0.08 233.17,0.1 233.17,55.09
  pour Bottom (isolate 0.762): 177.97,55.14 178.07,45.03 176.52,45.13 176.7,10.59 178.04,10.66 177.87,-0.08 233.06,0.1 233.06,55.09
GND_C2  (via drill 0.6)
  Top 0.305: R20.2 148.46,26.65 R5.1
  Top 0.406: U$2.IN- 154.19,44.98 152.35,43.14 v152.35,26.99 148.8,26.99 R5.1
  Top 1.016: 155.15,45.14 U$2.IN-
  Top 1.93: 155.15,45.14 155.15,47.96 155.88,48.69 R23.2 166.96,48.69 168.76,50.49 173.2,50.49 GND_C2.TP
  Top 2.54: GND_C2_C3.TP 121.77,52.78 128.01,52.78 135.81,44.98 U$2.OUT-
  Bottom 0.406: v152.35,26.99 151.33,26.99 U3.13 148.56,27.88 148.36,28.08 146.92,28.08 U3.12
  Bottom 3.2: GND_4_C2.TP 163.66,11.79 162.79,10.92 132.55,10.92 GND_2_C2.TP 131.56,11.83 130.89,12.5 130.89,42.96 GND_3_C2.TP 131.85,43.75 133.34,45.24 139.5,45.24 U$2.OUT- U$2.IN- 154.68,45.29 154.68,45.39 154.76,45.47 162.56,45.47 163.64,44.39 GND_1_C2.TP
  pour Bottom (isolate 0.813): 119.56,0.6 174.88,0.24 174.97,10.45 173.16,10.42 173.24,45.9 175.05,45.79 174.97,55.55 119.49,55.52 119.7,46.12 121.2,45.88 121.09,9.99 119.45,9.91
LED_S1  (via drill 0.6)
  Top 0.305: v203.22,25.19 216.91,25.19 U1.4
  Bottom 0.305: LED1.A v203.22,25.19
LED_S2
  Top 0.305: U1.5 216.04,23.62 193.04,23.62 189.46,27.2 183.1,27.2 181.99,28.31 181.99,28.67 181.44,29.22 | 181.66,29.22 181.44,29.22 | 181.44,29.22 179.63,29.22 L_C2.TP
LED_S2_C2  (via drill 0.6)
  Top 0.305: v165.1,29.13 171.17,29.13 L_C2_C1.TP
  Bottom 0.305: LED2.A 144.78,23.9 145.72,22.96 163.98,22.96 165.02,24 165.02,29.05 v165.1,29.13
LED_S3
  Top 0.305: U1.6 216.09,22.96 190.79,22.96 187.25,26.5 181.24,26.5 181.2,26.54 179.67,26.54 L_C3.TP
LED_S3_C3  (via drill 0.6)
  Top 0.406: v106.8,26.37 113.28,26.38 L_C2_C3.TP
  Bottom 0.406: LED3.A 83.63,23.52 84.64,22.51 105.9,22.48 105.88,22.43 106.82,23.33 v106.8,26.37
LED_S4
  Top 0.305: U1.7 216.19,22.35 185.2,22.35 183.75,23.81 179.88,23.81 L_C4.TP
LED_S4_C4  (via drill 0.6)
  Top 0.61: LEDC.TP 11.15,44.46 12.08,43.53 12.08,41.01 v12.13,40.95 | v12.08,36.68 12.08,29.06 16.45,24.69 v24.99,24.69
  Bottom 0.61: v12.13,40.95 12.13,36.74 v12.08,36.68 | v24.99,24.69 24.99,27.11 LED4.A
LED_T_S4
  Top 1.016: LED.TP 95.84,43.2 100.79,38.26 100.79,26.11 103.05,23.85 113.11,23.85 L_C2_C4.TP
MOTOR  (via drill 0.6)
  Top 0.305: U1.8 U1.9 220.12,25.71 216.18,21.77 183.34,21.77 v183.32,21.78
  Top 0.406: S1.3 199.31,3.98 197.84,5.45 197.84,7.44 196.55,8.74 185.34,8.74 183.28,10.8 v183.26,11.49
  Bottom 0.305: v183.32,21.78 183.32,11.9 v183.26,11.49
N$1
  Top 0.305: CN1.D+ 209.88,49.8 210.87,50.79 216.13,50.79 218.29,52.95 222.44,52.95 R1.1
N$2
  Top 0.305: R2.1 200,44.16 200.86,43.3 208.25,43.3 209.04,44.09 209.04,46.72 CN1.ID
N$3
  Top 0.305: CN1.GND 208.28,44.55 207.72,43.99 203.53,43.99 202.69,44.82 202.69,47.2 R3.1
N$4
  Top 0.305: R13.2 230.11,40.03 230.86,39.29 231.37,39.29 232,38.65 232,37.57 R11.2
N$5
  Top 0.406: 216.03,5.58 U$1.7
  Top 1: S1.4 209.95,6.52 R16.2 211.09,6.4 211.9,5.59 211.9,4.11 212.71,3.3 215.34,3.3 216.01,3.97 216.01,5.49 U$1.7
N$6  (via drill 2)
  other vias: 206,35.84
N$7  (via drill 0.6)
  Top 0.813: 169.73,8.07 169.73,8.08 169.48,8.08
  Top 1.27: CANH_C2_C3.TP 125.48,7.16 127.61,5.03 127.61,5.02 129.36,3.36 166.71,3.36 167.8,4.45 167.8,6.88 168.75,7.82 | CANH_C2.TP 170.32,8.07 | 170.32,8.07 169.73,8.07 | 168.75,7.82 170.08,7.82 170.32,8.07 | 168.75,7.82 170.28,9.36 v170.28,10.45
  Bottom 0.406: CANH_2_C2.TP 155.56,36.94 153.97,38.53 142.49,38.53 CANH_4_C2.TP 137.27,33.31 137.27,21.49 138.95,19.82 CANH_1_C2.TP 142.41,17.01 153.78,17.01 155.64,18.9 CANH_3_C2.TP
  Bottom 1.27: v170.28,10.45 170.28,21.13 168.48,22.94 166.02,22.94 162.83,19.75 CANH_3_C2.TP
N$8  (via drill 0.6)
  Top 0.406: R7.2 87.52,31.03 v86.73,31.81
  Bottom 0.406: U4.3 U4.2 v86.73,31.81
N$9
  Top 0.813: R17.1 219.05,4.69 218.18,5.53 U$1.8
N$10
  Top 0.406: SDA_S3_C1_C1.TP 129.31,15.64 132.71,12.24 162.18,12.24 165.58,15.64 171.32,15.64 SDA_S3_C3_C3.TP
N$11  (via drill 0.6)
  other vias: 212.06,49.8
N$12  (via drill 0.6)
  other vias: 207.67,49.8
N$13  (via drill 1.5)
  other vias: 60.62,30.35
N$14  (via drill 0.6)
  Top 0.305: R19.1 201.35,28.86 v201.22,28.85
  Bottom 0.305: v201.22,28.85 203.16,28.85 LED1.C
N$15  (via drill 0.6)
  Top 0.813: v142.85,28.62 144.69,28.64 R20.1
  Bottom 0.813: LED2.C 142.98,28.65 v142.85,28.62
N$16  (via drill 0.6)
  Top 0.406: R21.1 81.71,28.5 v81.68,28.49
  Bottom 0.406: v81.68,28.49 83.4,28.49 LED3.C
N$17  (via drill 0.6)
  Top 0.305: R22.1 22.86,29.13 v22.85,29.14
  Bottom 0.305: v22.85,29.14 24.92,29.14 LED4.C
N$18
  Top 1.016: LED5.C 159.4,50.68 R23.1
N$19  (via drill 1.5)
  other vias: 60.62,22.61
N$20
  Top 0.406: L_C1_C4.TP 128.09,23.87 128.98,22.98 128.98,20.16 134.21,14.93 160.6,14.93 165.45,19.78 165.45,23.06 166.29,23.9 171.19,23.9 L_C4_C1.TP
N$21  (via drill 0.6)
  Top 0.305: v205.1,32.58 205.1,28.91 R4.1
  Bottom 0.305: U2.2 206.49,31.71 205.64,32.56 205.13,32.56 v205.1,32.58
  Bottom 0.406: U2.2 U2.3
N$22
  Top 0.406: L_C1_C3.TP 128.72,26.64 130.1,25.27 130.1,21.2 135.07,16.22 159.94,16.22 164.08,20.36 164.08,25.22 165.38,26.51 171.07,26.51 L_C3_C2.TP
N$23  (via drill 2 pad 2.18)
  other vias: 213.99,27.86
N$24
  Top 2.54: D2.A 137.08,51.82 D3.A 137.14,54.13 U$2.OUT+
N$25  (via drill 2 pad 2.18)
  other vias: 197.99,27.86
N$26
  Top 0.406: SCL_S3_C1_C3.TP 128.55,18.43 133.5,13.48 161.47,13.48 166.37,18.38 171.25,18.38 SCL_S3_C3_C1.TP
N$27
  Top 0.406: SCL_S4_C1_C4.TP 130.73,34.54 132.97,32.3 132.97,24.38 134.34,23.01 159.64,23.01 160.86,24.23 160.86,30.19 165.25,34.59 171.17,34.59 SCL_S4_C4_C1.TP
N$28  (via drill 2 pad 2.18)
  other vias: 205.97,19.86
N$29  (via drill 2)
  other vias: 2.75,20.65
N$30  (via drill 2 pad 2.18)
  other vias: 139.55,27.86
N$31  (via drill 2 pad 2.18)
  other vias: 147.5,35.83
N$32  (via drill 0.6)
  Top 1.016: CANL_C2.TP 171.16,2.78 v169.52,2.78 | CANL_C2_C3.TP 122.65,2.18 v126.1,2.18
  Bottom 0.406: CANL_4_C2.TP 127.73,7.73 CANL_1_C2.TP 127.66,47.73 CANL_3_C2.TP | 167.59,47.75 CANL_2_C2.TP
  Bottom 0.61: 167.59,47.75 167.6,47.77 167.6,51.63 165.41,53.82 161.21,53.82 155.13,47.75 CANL_3_C2.TP
  Bottom 1.016: v169.52,2.78 167.65,4.65 CANL_4_C2.TP | v126.1,2.18 127.66,3.74 CANL_1_C2.TP
N$33  (via drill 2 pad 2.18)
  other vias: 155.55,27.86
N$34  (via drill 2 pad 2.18)
  other vias: 147.55,19.86
N$35  (via drill 2)
  other vias: 78.43,27.67
N$36  (via drill 2)
  other vias: 86.43,35.7
N$37  (via drill 2)
  other vias: 94.43,27.67
N$38  (via drill 2)
  other vias: 86.43,19.67
N$39  (via drill 2)
  other vias: 19.57,28.2
N$40  (via drill 2)
  other vias: 27.57,36.2
N$41  (via drill 2)
  other vias: 35.57,28.2
N$42  (via drill 2)
  other vias: 27.57,20.18
N$43  (via drill 0.6)
  Top 0.305: R5.2 148.69,30.83 147.95,31.57 v147.92,32.05
  Bottom 0.305: v147.92,32.05 147.95,29.72 U3.2 U3.3
N$44
  Top 0.406: SDA_S4_C1_C1.TP 129.84,32 131.39,30.45 131.39,22.45 136.5,17.34 159.15,17.34 162.84,21.02 162.84,29.56 165.25,31.97 SDA_S4_C4_C3.TP
N$45  (via drill 2)
  other vias: 10.96,20.71
N$46  (via drill 0.6)
  Top 0.305: R9.2 28.51,31 v27.8,31.71
  Bottom 0.305: U5.3 U5.2 v27.8,31.71
P0_1
  Top 0.305: U1.40 230,34.74 230,37.39 R11.1
P0_4
  Top 0.305: U1.43 227.97,34.83 228.8,35.71 228.8,46.39 CRYSTAL.2 229.89,46.53 230.25,46.88 C8.1
P0_5
  Top 0.305: U1.44 227.62,35.18 228.06,35.63 228.06,44.29 227.05,45.41 227.05,46.51 CRYSTAL.1 227.04,48.82 C9.1
SAR_BY  (via drill 0.6)
  Top 0.305: U1.1 217.35,28.54 217.15,28.74 217.15,30.66 215.45,32.36 211.95,32.36 v211.9,32.41 | v219.8,6.45 221.41,6.45 C6.1 | v197.31,30.48 196.37,29.54 183.61,29.54 183.17,29.97 v183.17,30.26
  Bottom 0.305: v211.9,32.41 211.9,33.24 211.41,33.72 200.37,33.72 200.34,33.75 200.06,33.75 197.31,31 v197.31,30.48 | 219.7,6.36 v219.8,6.45 219.83,6.43 219.83,3.49 218.51,2.18 183.95,2.18 181.06,5.08 181.06,29.29 181.94,30.17 183.08,30.17 v183.17,30.26
SCL_S1  (via drill 0.6)
  Top 0.305: U1.2 218.48,28.16 217.78,27.45 216.35,27.45 216.08,27.73 216.08,29.1 215.59,29.58 v210.74,29.58 210.01,28.86 R8.2
  Bottom 0.305: v210.74,29.58 U2.5
SCL_S2
  Top 0.305: SCL_S2_C2.TP 181.94,40 181.94,39.62 184.65,36.9 184.65,35.46 185.56,34.55 195.85,34.55 201.21,39.91 201.25,39.91 201.36,40.02 218.6,40.02 218.62,40
  Top 0.32: 218.62,40 U1.51
SCL_S2_U  (via drill 0.6)
  Top 1.016: SCL_S2_C2_C1.TP 165.54,40.05 v162.22,36.73 R10.2
  Bottom 0.406: U3.5 150.16,30.52 151.08,31.44 161.4,31.44 162.66,32.71 162.66,36.28 v162.22,36.73
SCL_S3
  Top 0.305: SCL_S3_C3.TP 194.49,18.33 196.06,16.76 214.13,16.76 U1.12
SCL_S3_U  (via drill 0.5)
  Top 0.813: R27.1 84.26,13.16 86.16,15.06 103.91,15.06 106.93,18.08 | 106.93,18.08 107.02,18.17 113.19,18.17 SCL_S3_C3_C2.TP | v100.21,23.95 101.05,23.95 106.93,18.08
  Bottom 0.813: U4.5 91.3,29.35 92.06,28.58 92.06,24.87 93.03,23.89 100.15,23.89 v100.21,23.95
SCL_S4
  Top 0.305: SCL_S4_C4.TP 181.71,34.56 183.29,32.99 197.3,32.99 199.71,35.4
  Top 0.32: 198.88,34.56 199.71,35.4 202.7,38.39 207.64,38.39 210.98,35.05 218.62,35.05 U1.58
SCL_S4_U  (via drill 0.5)
  Top 1.016: SCL.TP 66.6,52.4 68.23,50.91 68.23,42.79 69.91,41.19 94.36,41.11 98.95,36.48 98.94,30.26 v98.78,30.21 | v103.41,30.29 103.41,32.05 105.75,34.38 113.27,34.38 SCL_S4_C4_C2.TP
  Bottom 1.016: v98.78,30.21 103.34,30.21 v103.41,30.29
SCL_S4_U_1  (via drill 0.5)
  Top 1.016: R25.1 v4.78,31.11 4.78,32.83 SCL2.TP
  Bottom 0.305: U5.5 30.04,33.59 29.68,33.95 5.89,33.95 SCL2.TP 4.94,31.27 v4.78,31.11
SDA_S1  (via drill 0.6)
  Top 0.305: U1.3 218.79,27.83 217.32,26.33 v216.1,26.33 | R6.2 206.98,31.96 v207.54,32.56
  Bottom 0.305: 208.38,31.34 207.95,30.91 207.95,29.64 U2.4 | v216.1,26.33 216.1,30.14 214.91,31.34 208.38,31.34 | v207.54,32.56 207.72,32.58 207.87,32.37 207.85,31.87 208.38,31.34
SDA_S2
  Top 0.305: SDA_S2_C1.TP 182.77,37.31 183.82,36.26 183.82,34.89 184.88,33.83 196.7,33.83 202.07,39.2
  Top 0.32: 202.07,39.2 218.72,39.2 U1.52
SDA_S2_U  (via drill 0.6)
  Top 1.016: SDA_S2_C2_C2.TP 164.77,37.28 v160.42,32.96 159.69,33.63 159.69,44.3 R12.2
  Bottom 0.406: U3.4 149.41,31.1 150.55,32.23 159.66,32.23 v160.42,32.96
SDA_S3
  Top 0.305: SDA_S3_C1.TP 195.76,15.64 196.06,15.94 214.03,15.94 U1.13
SDA_S3_U  (via drill 0.5)
  Top 0.35: v92.06,31.38 92.06,24.99 93.34,23.71 98.32,23.71 v103.31,18.72
  Top 0.813: R26.1 87.98,12.14 89.14,13.3 105.19,13.3 v107.05,15.15 107.32,15.43 113.22,15.43 SDA_S3_C3_C4.TP
  Bottom 0.35: U4.4 88.24,30.61 89.14,31.51 91.94,31.51 v92.06,31.38 | v103.31,18.72 103.49,18.72 v107.05,15.15
SDA_S4
  Top 0.305: SDA_S4_C1.TP 182.57,31.9 182.94,32.27 200.55,32.27 201.83,33.55
  Top 0.32: 201.83,33.55 202.03,33.75 219.22,33.75 U1.59
SDA_S4_U  (via drill 0.5)
  Top 1.016: SDA.TP 65.4,49.36 66.77,48.06 66.77,41.47 69.04,39.21 92.6,39.21 97.06,34.75 97.06,29.7 v97.07,28.05 | v103.41,28.09 107.13,28.09 108.6,29.56 108.6,30.95 109.55,31.9 113.43,31.9 | 114.29,31.9 113.43,31.9 | 113.43,31.9 SDA_S4_C4_C4.TP
  Bottom 1.016: v97.07,28.05 v103.41,28.09
SDA_S4_U_1  (via drill 0.5)
  Top 1.016: R24.1 8.01,26.55 9.1,27.64 v9.1,32.62 9.1,35.18 8.55,35.73 4.88,35.73 SDA2.TP
  Bottom 0.305: U5.4 29.29,32.64 28.81,33.12 9.61,33.12 v9.1,32.62
SWDCLK  (via drill 0.6)
  Top 0.305: R2.2 200,50.97 v199.97,51.43 | v226.19,17.77 228.34,17.77 229,18.43 229,23.25 U1.21
  Bottom 0.305: v199.97,51.43 200.05,51.35 226.97,51.35 228.42,49.9 228.42,23.16 226.64,21.38 226.59,21.38 226.26,21.05 226.26,17.85 v226.19,17.77
SWDIO  (via drill 0.6)
  Top 0.305: R3.2 202.66,52.83 v202.77,52.93 | U1.20 228.37,23.18 228.37,20.44 227.89,19.96 v227.61,19.96
  Bottom 0.305: v202.77,52.93 227.68,52.93 229.66,50.95 229.69,21.94 v227.61,19.96
VCC_C2  (via drill 0.6)
  Top 2.54: 170.78,47.59 v171.49,47.59 VCC_C2.TP | VCC_C2_C3.TP 121.63,49.72 125.17,49.72 133.51,41.37 v139.82,41.37
  Top 3.2: U$2.IN+ 146.58,54.13 144.69,52.24 144.69,41.59 v144.47,41.37
  Bottom 2.54: v171.49,47.59 171.43,47.54 171.43,42.6 170.94,42.1 170.94,41.94 169.53,40.53 162.35,40.53 161.61,39.79 VCC_2_C2.TP
  Bottom 3.2: VCC_4_C2.TP 159.65,15.66 158.7,14.71 136.66,14.71 VCC_1_C2.TP 135.6,15.76 134.68,16.68 134.68,38.69 VCC_3_C2.TP 135.69,39.79 136.49,40.58 136.49,40.74 137.12,41.37 v139.82,41.37 v144.47,41.37 158.05,41.37 VCC_2_C2.TP
  pour Top (isolate 0.813): 119.6,0.62 174.94,0.51 175.12,10.45 172.91,10.42 173.35,45.75 175.03,45.62 175.12,55.56 119.51,55.49 119.76,46.05 121.16,45.97 121.51,9.85 119.43,9.99
VCC_C3  (via drill 0.6)
  Top 2.184: v111.72,45.95 111.72,49.64 | VCC.TP v101.33,49.57
  Top 2.54: 111.72,49.64 VCC_C3.TP
  Bottom 2.184: v101.33,49.57 v101.33,49.58 103.96,52.2 109.86,52.2 111.64,50.43 111.64,46.03 v111.72,45.95
  Bottom 3.2: VCC_2_C3.TP 96.74,13.79 76.37,13.79 75.69,14.47 75.69,14.48 VCC_1_C3.TP 73.08,17.09 73.08,38.04 74.5,39.46 VCC_4_C3.TP 76.33,41.37 94.19,41.37 95.9,39.66 VCC_3_C3.TP 110.7,39.66 111.68,40.63 111.68,45.91 v111.72,45.95
  pour Top (isolate 0.813): 58.95,0.28 114.24,0.05 114.01,10.26 115.9,10.37 116.12,45.1 114.52,45.17 114.27,55.2 58.69,55.31
VCC_C4  (via drill 0.6)
  Top 2.54: C2.+ 2.71,13.8 D1.C 2.82,5.7 4.88,3.64 18.02,3.64 19.53,5.15 v19.53,13.91
  Top 2.6: VCC2.TP 37.48,53.03 42.1,48.4 42.1,36.15 v41.43,35.48
  Top 3.2: BATTERY+.TP 39.04,7.11 36.74,9.42 36.74,13.81 v36.64,13.91
  Bottom 3.2: VCC_1_C4.TP 16.22,16.2 18.51,13.91 v19.53,13.91 v36.64,13.91 37.17,13.91 VCC_2_C4.TP 39.64,16.56 41.43,18.35 v41.43,35.48 41.43,38.35 VCC_3_C4.TP 39.35,40.25 38.25,41.35 38.25,41.46 37.46,42.26 17.53,42.26 VCC_4_C4.TP
  pour Top (isolate 0.762): -0.01,0.81 55.02,0.43 55.05,55.26 0.11,55.33 -0.01,7.78
VCCC  (via drill 0.6)
  Top 0.305: C1.+ 227.63,13.06 v226.14,14.55
  Top 2.54: VCC_C1.TP 187.15,47.59 188.64,46.1 188.64,38.61 190.08,37.17 v193.32,37.17
  Bottom 1.93: 217.32,15.22 217.42,15.32 225.32,15.32 226.09,14.55 v226.14,14.55 229.59,11.1 229.59,5.58 228.78,4.76 227.51,4.76 226.82,4.07 DINA.2
  Bottom 3.2: VCC_1_C1.TP 217.94,15.79 217.42,15.28 217.38,15.28 217.32,15.22 216.97,14.87 194.87,14.87 VCC_2_C1.TP 193.32,16.42 v193.32,37.17 193.32,39.18 VCC_4_C1.TP 193.91,39.91 194.64,40.65 216.89,40.65 VCC_3_C1.TP
  pour Top (isolate 0.762): 178.08,55.14 178.18,45.03 176.63,45.13 176.81,10.59 178.16,10.66 177.98,-0.08 233.17,0.1 233.17,55.09
VCCD
  Top 0.305: U1.48 226.08,36.6 225.4,37.28 225.4,39.81 C7.1
VDDA
  Top 0.305: 196.52,17.57 196.6,17.57 | 196.6,17.57 214.24,17.57 U1.11 221.67,25.02 221.72,25.02 223.14,26.44 223.14,31.94 U1.56 | VDDA_C1.TP 181.99,21.1 183.25,19.84 194.33,19.84 196.6,17.57
VDDA2  (via drill 0.6)
  Top 0.813: L1.2 161.15,8.45 163.52,8.45 164.34,9.27 164.34,12.43 166.36,14.44 v167.07,14.44 | v167.33,21.1 VDDA_C2.TP
  Bottom 0.813: v167.07,14.44 167.33,14.7 v167.33,21.1
VDDD
  Top 0.305: 181.28,53.21 VDDD_C1.TP 181.21,53.28 195.49,53.28 197.3,51.47 197.3,42.76 198.9,41.16 218.15,41.16 U1.50
VDDD2
  Top 0.813: VDDD_C2.TP
  Top 1.27: L2.2 VDDD_C2.TP
VDDIO
  Top 0.27: 214.46,15.13 214.64,15.13 216.4,16.89 216.44,16.89 216.56,17.02 228.65,17.02 229.87,18.24 229.87,25.92 229.82,25.98
  Top 0.28: 186.33,14.73 196.15,14.73 196.56,15.13 214.46,15.13
  Top 0.305: U1.26 229.82,25.98 | VDDIO_C1.TP 179.47,13.07 184.68,13.07 186.33,14.73
VDDIO2
  Top 0.813: R15.2 165.31,5.49 165.93,6.07 165.88,11.91 167.08,13 171.17,13 VDDIO_C2.TP
XRES
  Top 0.305: U1.47 227.25,36.95 227.25,44.16 226.62,44.8 224,44.8 223.21,45.59 223.21,47.63 R14.2 C10.1 223.22,49.65 R1.2

## Text on the board
bNames: EMERGE FACE 4 | EMERGE FACE 3 | EMERGE FACE 2 | EMERGE FACE 1